# Altium PCB PCBSANPHAMBAOTRAN.PcbDoc
Units mil, origin at the board's own origin, x right, y up, seen from the top; angles counter-clockwise.
Board outline 8350 x 5430 mil, 2 copper layers (Top Layer, Bottom Layer); 65 components, 91 nets, 309 pads, 102 vias.
Unrouted connection lines stored in the file: 1.
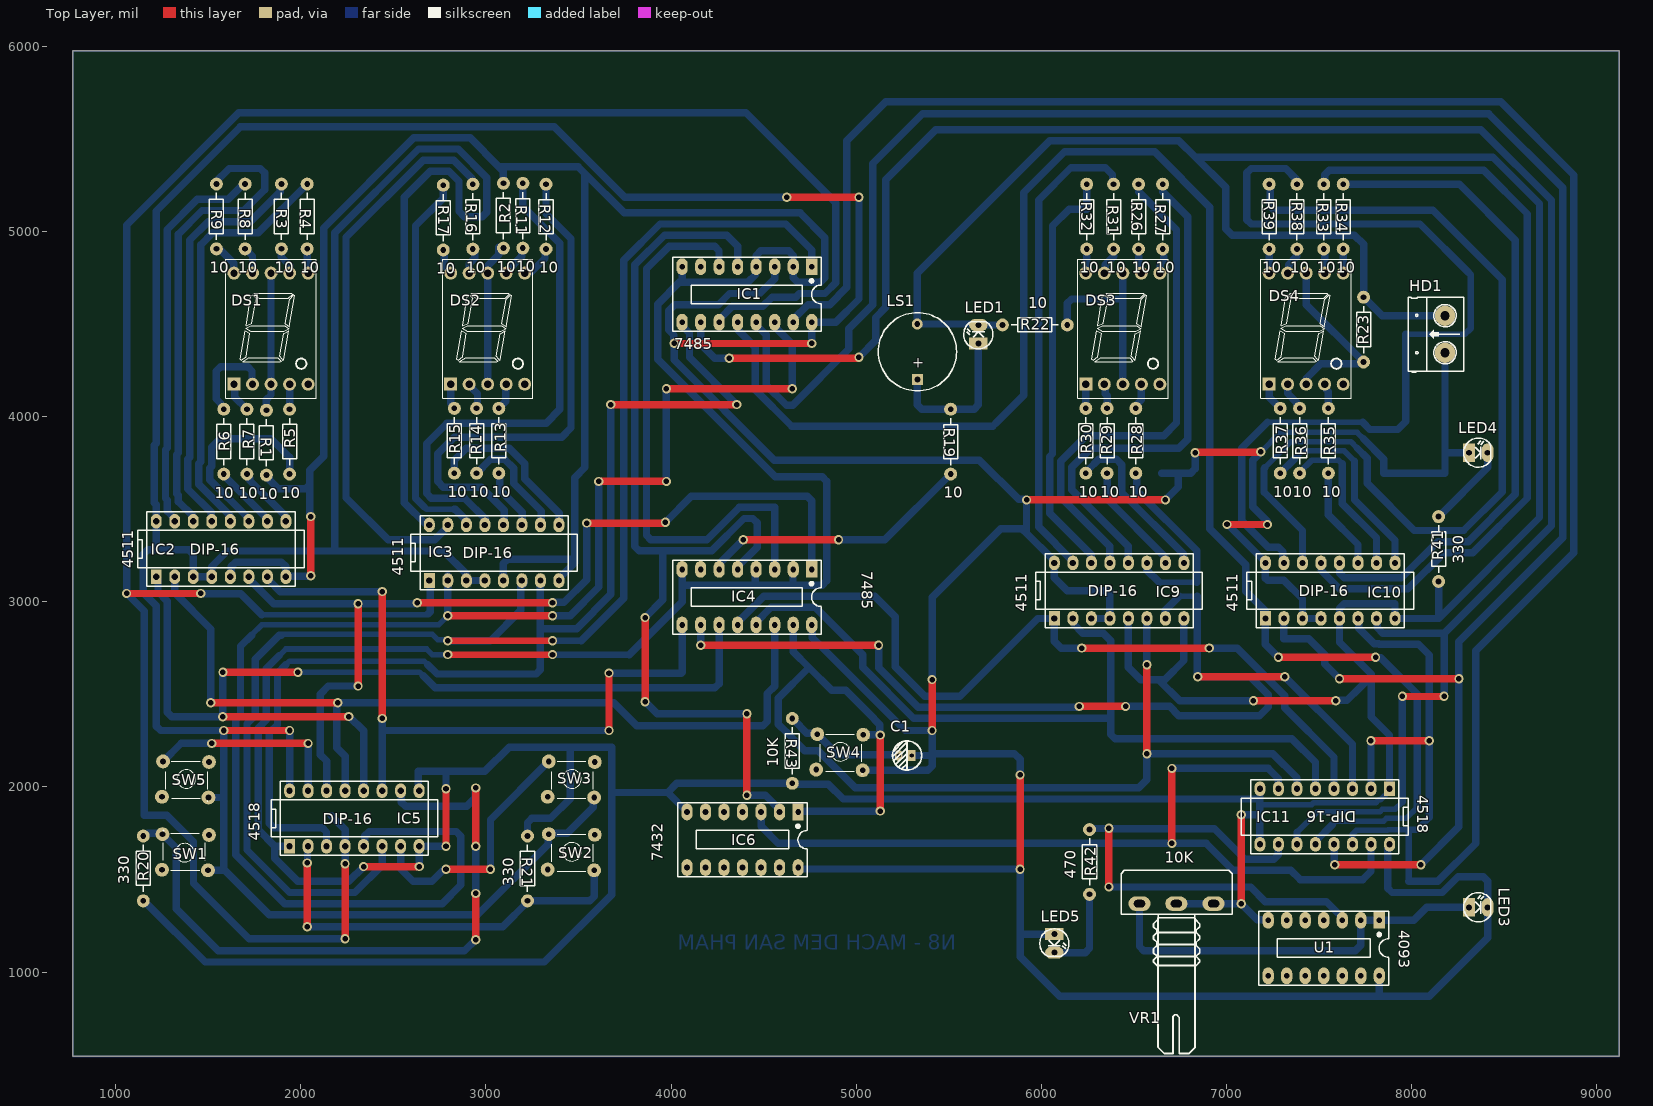
[diagram p0: Top Layer view]
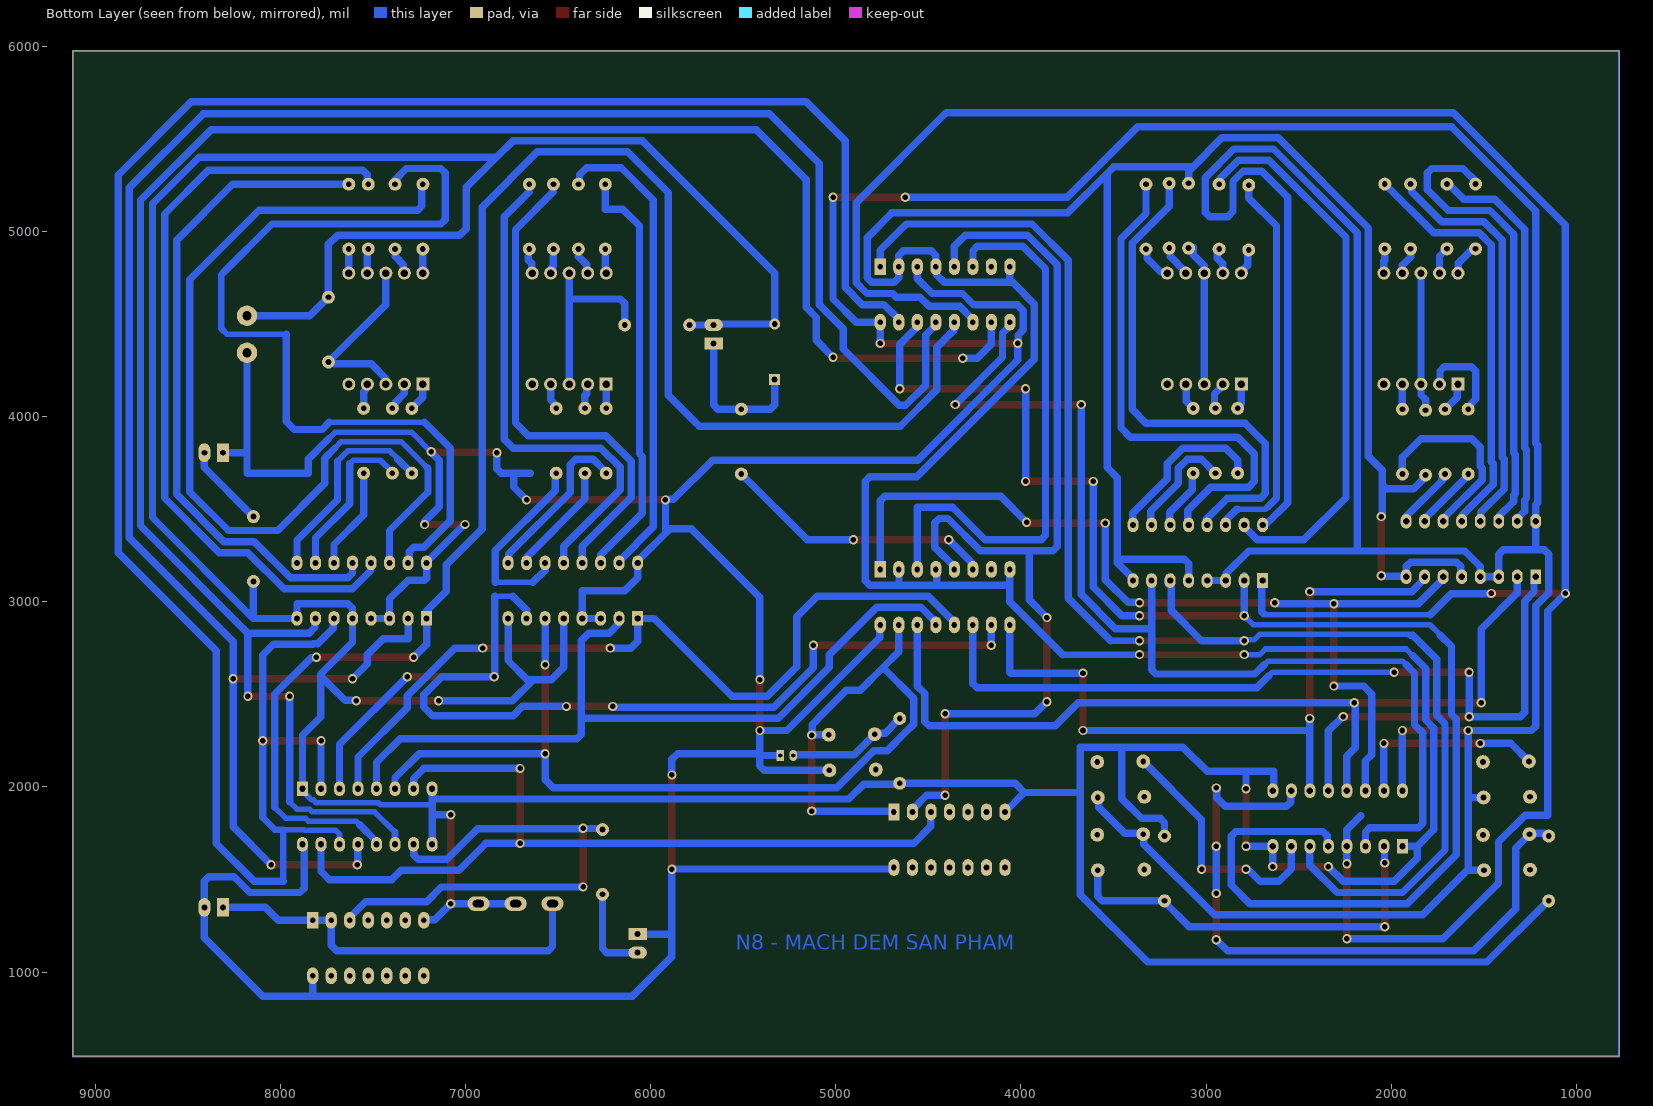
[diagram p1: Bottom Layer view, seen from below]
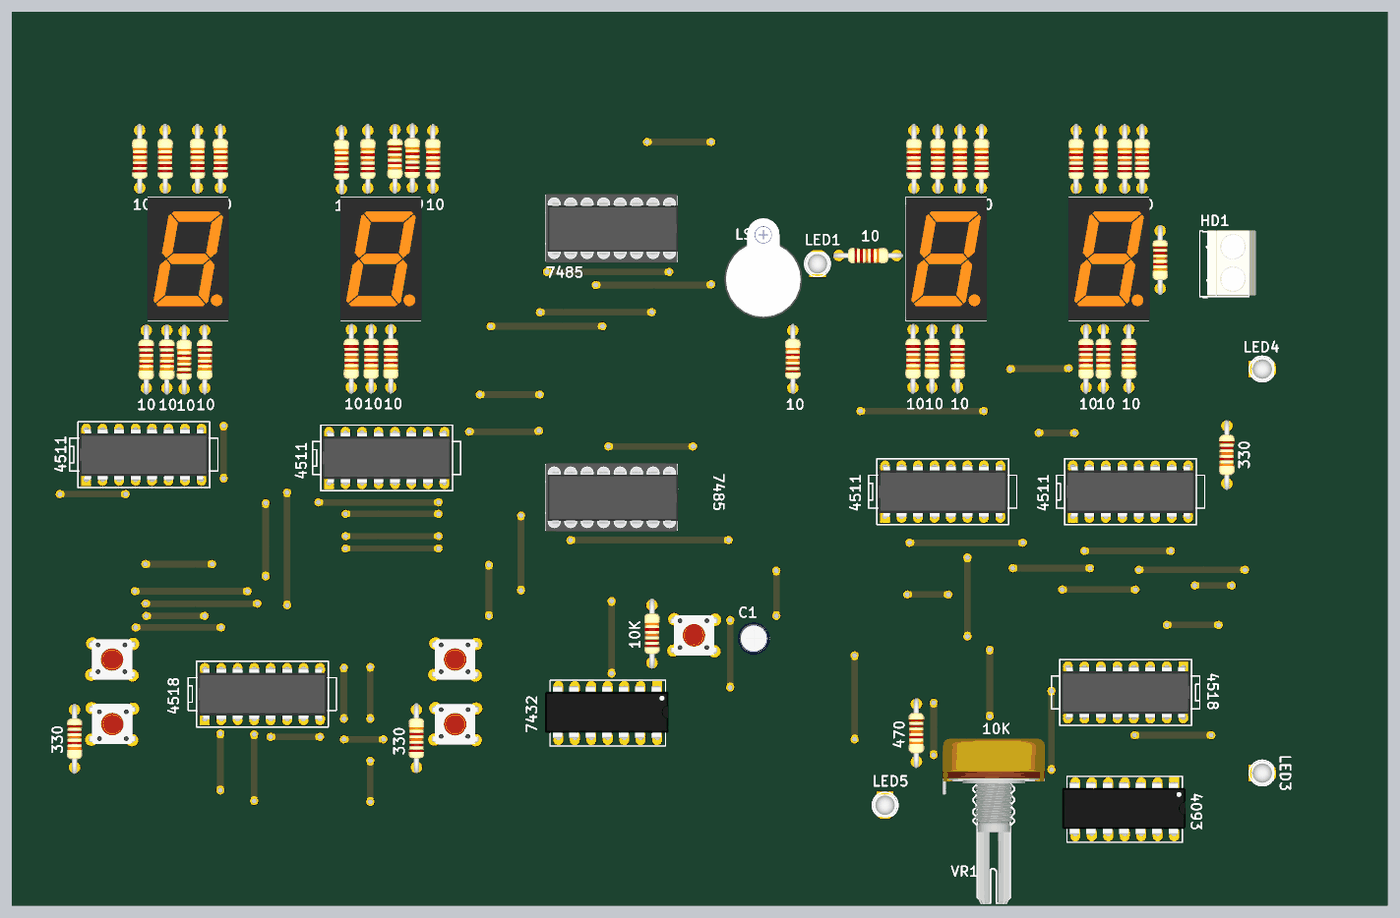
[diagram p2: 3D render of the assembled board from above, using the file's embedded part models]

## Layer stack, top to bottom
Top Solder: solder mask 0.4, Solder Resist, Dk 3.5
Top Layer: signal copper 1.4
Dielectric 1: dielectric 12.6, FR-4, Dk 4.8
Bottom Layer: signal copper 1.4
Bottom Solder: solder mask 0.4, Solder Resist, Dk 3.5

## Board outline
770,545 9120,545 9120,5975 770,5975

## Design rules (kind name [scope] priority, off if disabled: settings)
Clearance [All] p1: gap=20 ignorepadtopadclearanceinfootprint=FALSE
PolygonConnect [All] p1: connectstyle=Relief reliefconductorwidth=10 reliefentries=4 polygonreliefangle="90 Angle" airgapwidth=10
RoutingVias [All] p1: holewidth=30 width=50 viastyle="Through Hole" minholewidth=30 minwidth=50 maxholewidth=30 maxwidth=50
SolderMaskExpansion [All] p1: expansion=4 istentingtop=FALSE
Width [All] p1: maxlimit=40 minlimit=35 preferedwidth=40
30 further rules are at their usual default settings.

## Components (designator, comment, footprint, x,y, rotation, side; value= is the part's Value field where it differs from the comment)
C1 "10uF" "tu hoa 4mm" 5275,2170 r180 top
DS1 "7SEG" LED7SEG-1-0.56 1835,4450 r0 top
DS2 "7SEG" LED7SEG-1-0.56 3005,4450 r0 top
DS3 "7SEG" LED7SEG-1-0.56 6435,4450 r0 top
DS4 "7SEG" LED7SEG-1-0.56 7425,4450 r0 top
HD1 "Header 2" HED2 8180,4345 r90 top
IC1 "7485" DIP16/W0.3 4760,4810 r180 top
IC2 "4511" DIP16 1570.29,3285.08 r0 top value=74LS238
IC3 "4511" DIP16 3045,3265 r0 top value=74LS238
IC4 "7485" DIP16/W0.3 4760,3175 r180 top
IC5 "4518" DIP16 2290.29,1830.08 r0 top value=74LS238
IC6 "7432" DIP14/W0.3 4686.51,1865 r180 top
IC9 "4511" DIP16 6420.29,3060.08 r0 top value=74LS238
IC10 "4511" DIP16 7560.29,3060.08 r0 top value=74LS238
IC11 "4518" DIP16 7530,1840 r180 top value=74LS238
LED1 "LED" LED-3 5660,4395 r90 top value="LED 3 ly Single Colour"
LED3 "led thu" LED-3 8310,1350 r0 top value="LED 3 ly Single Colour"
LED4 "led phat" LED-3 8310,3805 r0 top value="LED 3 ly Single Colour"
LED5 "LED" LED-3 6070,1205 r270 top value="LED 3 ly Single Colour"
LS1 "Speaker" SPEAKER 5330.5,4200 r90 top
R1 "10" R1/4W 1815,4034.4 r270 top value="R1/4W - 1K"
R2 "10" R1/4W 3095,4910 r90 top value="R1/4W - 1K"
R3 "10" R1/4W 1896.01,5256.01 r270 top value="R1/4W - 1K"
R4 "10" R1/4W 2035,5256.01 r270 top value="R1/4W - 1K"
R5 "10" R1/4W 1940,3690 r90 top value="R1/4W - 1K"
R6 "10" R1/4W 1585,3690 r90 top value="R1/4W - 1K"
R7 "10" R1/4W 1710,3690 r90 top value="R1/4W - 1K"
R8 "10" R1/4W 1700,5256.01 r270 top value="R1/4W - 1K"
R9 "10" R1/4W 1545,5256.01 r270 top value="R1/4W - 1K"
R11 "10" R1/4W 3200,5260 r270 top value="R1/4W - 1K"
R12 "10" R1/4W 3325,5255 r270 top value="R1/4W - 1K"
R13 "10" R1/4W 3070,3694.51 r90 top value="R1/4W - 1K"
R14 "10" R1/4W 2950,3694.51 r90 top value="R1/4W - 1K"
R15 "10" R1/4W 2830,3694.51 r90 top value="R1/4W - 1K"
R16 "10" R1/4W 2930,5255 r270 top value="R1/4W - 1K"
R17 "10" R1/4W 2770,5250 r270 top value="R1/4W - 1K"
R19 "10" R1/4W 5510,4040 r270 top value="R1/4W - 1K"
R20 "330" R1/4W 1150,1385 r90 top value="R1/4W - 1K"
R21 "330" R1/4W 3225,1735 r270 top value="R1/4W - 1K"
R22 "10" R1/4W 6140,4495 r180 top value="R1/4W - 1K"
R23 "10" R1/4W 7740,4295 r90 top value="R1/4W - 1K"
R26 "10" R1/4W 6525,5255 r270 top value="R1/4W - 1K"
R27 "10" R1/4W 6655,5255 r270 top value="R1/4W - 1K"
R28 "10" R1/4W 6510,3694.51 r90 top value="R1/4W - 1K"
R29 "10" R1/4W 6355,3694.51 r90 top value="R1/4W - 1K"
R30 "10" R1/4W 6240,3694.51 r90 top value="R1/4W - 1K"
R31 "10" R1/4W 6390,5255 r270 top value="R1/4W - 1K"
R32 "10" R1/4W 6245,5255 r270 top value="R1/4W - 1K"
R33 "10" R1/4W 7525,5255 r270 top value="R1/4W - 1K"
R34 "10" R1/4W 7630,5255 r270 top value="R1/4W - 1K"
R35 "10" R1/4W 7550,3694.51 r90 top value="R1/4W - 1K"
R36 "10" R1/4W 7395,3694.51 r90 top value="R1/4W - 1K"
R37 "10" R1/4W 7290,3694.51 r90 top value="R1/4W - 1K"
R38 "10" R1/4W 7380,5255 r270 top value="R1/4W - 1K"
R39 "10" R1/4W 7230,5255 r270 top value="R1/4W - 1K"
R41 "330" R1/4W 8145,3110 r90 top value="R1/4W - 1K"
R42 "470" R1/4W 6260,1420 r90 top value="R1/4W - 1K"
R43 "10K" R1/4W 4655,2370 r270 top value="R1/4W - 1K"
SW1 "SW" SW4 1499,1550 r180 top value="Button chip 4 pin"
SW2 "SW" SW4 3340,1745 r0 top value="Button chip 4 pin"
SW3 "SW" SW4 3340,2138 r0 top value="Button chip 4 pin"
SW4 "SW" SW4 4790,2285 r0 top value="Button chip 4 pin"
SW5 "SW" SW4 1257,2138 r0 top value="Button chip 4 pin"
U1 "4093" DIP14 7825,1280 r180 top
VR1 "10K" VR-S1 6730,1370 r0 top value="Volume 50k"

## Footprints (in the part's own frame and the unit in brackets; to place one, negate y for a bottom-side part, rotate by r counter-clockwise, add the part's x,y. Pads: shape width x height; smd on the part's side, far side on the other; paste and mask are expansions set on the pad)
DIP14 [mil] "DIP, 14-Leads, Row Spacing 7.62mm, Pitch 2.54mm, Body 19.2x6.6mm"
  rect 60x90 hole 31: 1(0,0)
  oval 60x90 hole 31: 2(100,0) 3(200,0) 4(300,0) 5(400,0) 6(500,0) 7(600,0) 8(600,300) 9(500,300) 10(400,300) 11(300,300) 12(200,300) 13(100,300) 14(0,300)
  silkscreen extent -50,-50 650,350, body extent -70,-12 680,302, height 145
DIP14/W0.3 [mil] "14PIN, W 300mil, Pin to pin 100mil"
  rect 60x90 hole 31: 1(0,0)
  oval 60x90 hole 31: 2(100,0) 3(200,0) 4(300,0) 5(400,0) 6(500,0) 7(600,0) 8(600,300) 9(500,300) 10(400,300) 11(300,300) 12(200,300) 13(100,300) 14(0,300)
  silkscreen extent -50,-50 650,350, body extent -70,-12 680,302, height 145
DIP16 [mm]
  rect 1.5x2 hole 0.864: 1(-8.897,-3.812)
  oval 1.5x2 hole 0.864: 2(-6.357,-3.812) 3(-3.817,-3.812) 4(-1.277,-3.812) 5(1.263,-3.812) 6(3.803,-3.812) 7(6.343,-3.812) 8(8.883,-3.812) 9(8.883,3.808) 10(6.343,3.808) 11(3.803,3.808) 12(1.263,3.808) 13(-1.277,3.808) 14(-3.817,3.808) 15(-6.357,3.808) 16(-8.897,3.808)
  silkscreen extent -11.44,-5.08 11.42,5.08, body extent -10,-3.93 10,3.94, height 1.99
DIP16/W0.3 [mil] "16 PIN, W 300mil, Pin to pin 100mil"
  rect 60x90 hole 31: 1(0,0)
  oval 60x90 hole 31: 2(100,0) 3(200,0) 4(300,0) 5(400,0) 6(500,0) 7(600,0) 8(700,0) 9(700,300) 10(600,300) 11(500,300) 12(400,300) 13(300,300) 14(200,300) 15(100,300) 16(0,300)
  silkscreen extent -50,-50 750,350, body extent -52,-57 752,356, height 299
HED2 [mil] "Header 2, 2 pin, hight 300mil, Pin to Pin 200, Colour Green"
  round 110 hole 50: 1(0,0) 2(200,0)
  silkscreen extent -106,-100 300,200, body extent -92,-140 302,155, height 394
LED7SEG-1-0.56 [mil]
  rect 70x70 hole 40: 1(-195,-275)
  round 70 hole 40: 2(-95,-275) 3(5,-275) 4(105,-275) 5(205,-275) 6(205,325) 7(105,325) 8(5,325) 9(-95,325) 10(-195,325)
  silkscreen extent -239,-350 249,400, body extent -241,-349 251,399, height 315
LED-3 [mil] "LED 2 PIN, 3ly Only colour"
  rect 65x100 hole 32: 1(0,0)
  oval 65x100 hole 32: 2(100,0)
  silkscreen extent -29,-78 118,79, body extent -13,-75 125,75, height 217
R1/4W [mil] "R 1/4W, 2 Pin, 350mil"
  round 70 hole 31: 1(0,0) 2(350,0)
  silkscreen extent 48,-38 302,38, body extent -40,-47 386,47, height 111
SPEAKER [mm]
  rect 1.5x1.5 hole 0.8: 1(0,0)
  round 1.5 hole 0.8: 2(7.62,0.013)
  silkscreen extent -1.55,-5.38 9.18,5.36, body extent -2.22,-6 13.24,6, height 4.5
SW4 [mil] "SW button 4pin, 250 x250 mil"
  round 75 hole 31: 1(0,0) 2(245,-195) 3(248,-3) 4(-6,-191)
  silkscreen extent 15,-215 240,0, body extent -36,-220 276,24, height 276
"tu hoa 4mm" [mm]
  rect 1x1.5 hole 0.6: 1(-0.635,0)
  oval 1x1.5 hole 0.6: 2(1.143,0)
  silkscreen extent -2,-2 2.01,2.01, body extent -2.47,-2.47 2.58,2.58, height 14.81
VR-S1 [mil]
  oval 120x78.74 hole 40 slot 60 at 0 deg: 1(-200,0) 2(-1,0) 3(200,0)
  silkscreen extent -299,-810 300,179, body extent -310,-818 310,188, height 839

## Part data
C1: library part "Tu Hoa 10uF 25V 4x7", "Cắm", Chung_Loai=Cắm, Don_Vi=Con, Ma_Hang=MH001349, So_Chan=2, Ten_Linh_Kien="Tụ Hóa 10uF 25V 4x7MM"
DS1 DS2 DS3 DS4: library part LED7SEG-1, "14.2 mm General Purpose Blue 7-Segment Display: CC, RH DP, Gray Surface", Colour=Blue, PackageDocument=24-Sep-2002, ComponentLink1Description="Manufacturer Link", ComponentLink1URL=http://www.agilent.com/, DatasheetDocument=24-Sep-2002, LatestRevisionDate=17-Dec-2003, LatestRevisionNote="Schematic revised, PCB Footprint replaced.", MinimumIntensity="2020 ucd", Note="IF = 10 mA", PackageReference=H, Published=8-Jun-2000, Publisher="Altium Limited"
HD1: library part Hed2, "Header 2 (Green)"
IC1 IC4: "4-Bit Magnitude Comparator", Copyright by=VanDungEvn@Gmail.com
IC2 IC3 IC5 IC9 IC10 IC11: library part 74247, Copyright by=VanDungEvn@Gmail.com
IC6: "Quad 2-Input OR Gate"
LED1 LED5: "LED Single colour Green and Red"
LED3 LED4: library part LED, "LED Single colour Green and Red"
LS1: "Loudspeaker", LatestRevisionDate=17-Jul-2002, LatestRevisionNote="Re-released for DXP Platform.", PackageReference=PIN2, Published=24-Mar-1999, Publisher="Altium Limited"
R1 R2 R3 R4 R5 R6 R7 R8 R9 R11 R12 R13 R14 R15 R16 R17 R19 R20 R21 R22 R23 R26 R27 R28 R29 R30 R31 R32 R33 R34 R35 R36 R37 R38 R39 R41 R42 R43: library part R1/4W, "Resistor 1/4W"
SW1 SW2 SW3 SW4 SW5: library part SW4, "Switch button 4 pin"
U1: "Quad 2-INPUT NAND SCHMITT TRIGGER"
VR1: library part VR-S, "Var Resistor"

## Via types
v1: diameter 50, hole 30, Top Layer to Bottom Layer, 102 vias

## Nets (pads, with @x,y where several pads share a name; then routed paths per layer and width w, separated by ;. In a path a pad name is that pad's centre, name@x,y a point inside that pad or via, vN(x,y) a via of type N, cw(c..) or ccw(c..) an arc to the next point about the centre after c; other vN are vias at no path point)
1: C1.2 IC4.15 IC6.1 IC9.6 IC11.6 R43.1 SW4.1 | length 6747.9
  Top Layer w40: v1(5130,1870) v1@5130,2277.29 ; v1(6570,2180) v1(6570,2660)
  Bottom Layer w40: IC4.15 4660,2730 4745,2645 ; R43.1@4664.52,2360.48 4734,2291 SW4.1@4790,2291 ; IC6.1 4693.42,1865 4696.51,1868.09 5128.09,1868.09 v1(5130,1870) ; SW4.1 4900,2175 C1.2@5230,2175 ; 5038,2282 5039,2281 5129,2281 v1(5130,2280) 5128.09,2281.91 5128.09,2336.91 5067.88,2397.12 4942.9,2522.1 4867.9,2522.1 4745,2645 ; C1.2 C1.2@5230,2179.21 ; v1(6570,2660) IC9.6 ; IC11.6 7380.29,2050 7250.29,2180 v1(6570,2180) 6570,2040 6525,1995 4995.15,1995 4794.15,2196 4722.93,2196 4623.93,2295 4580,2338.93 4580,2480 4745,2645
2: IC4.13 IC9.2 IC11.5 | length 4338.3
  Bottom Layer w40: IC4.13 4460,2890 4540,2970 4778.99,2970 5034.57,2714.42 5034.57,2645.58 5310.15,2370 6375,2370 ; IC9.2 6173.65,2906.35 6173.65,2881.35 6224.37,2830.63 6334.37,2830.63 6375,2790 6375,2370 ; IC11.5 7480.29,2132.81 7353.11,2260 6398.43,2260 6375,2283.43 6375,2370
3: IC4.12 IC9.1 IC11.4 | length 4443.2
  Top Layer w40: v1(6218.43,2750) v1(6907,2750)
  Bottom Layer w40: IC4.12 4360,2890 4500,3030 5100,3030 5210,2920 5210,2650 5370,2490 5560.47,2490 5980.47,2910 IC9.1 6070,2786.17 6107.73,2748.43 6216.86,2748.43 v1(6218.43,2750) ; v1(6907,2750) 7057.99,2750 7314.56,2493.43 7314.56,2427.3 7580.29,2161.57 IC11.4
4: IC4.10 IC9.7 IC11.3 | length 5822.4
  Top Layer w40: v1(4160,2765) 4160.48,2765.48 5120.48,2765.48 v1(5120.96,2765.96) ; v1@6207.71,2435 v1(6455,2435) ; v1(6845,2595) v1(7315,2595)
  Bottom Layer w30: 6745,3030 6842,3030
  Bottom Layer w40: v1(4160,2765) IC4.10 ; v1(5120.96,2765.96) 5120.96,2644.04 5335,2430 6197.29,2430 6202.29,2435 v1(6205,2435) ; v1(6455,2435) 6692.88,2435 6742.88,2385 7178.14,2385 7225,2431.86 7225,2498.14 7128.14,2595 v1(6845,2595) 6842,2598 6842,3030 ; IC9.7 6670,2955 6745,3030 ; v1(7315,2595) 7680.29,2229.71 IC11.3
5: IC1.15 IC10.6 IC11.2 IC11.14 | length 12353.9
  Top Layer w40: v1(7780,2250) v1(8095,2250)
  Bottom Layer w30: IC11.14 7680.31,1745.31 7700.71,1765.71 7869.15,1765.71 7873.45,1770 7985,1770
  Bottom Layer w35: 7985,1490 7985,1770 8030,1770 8095,1835
  Bottom Layer w40: IC1.15 4660,4525 4740,4605 4856.27,4605 4950,4698.73 4950,5490 5160,5700 8480,5700 8875,5305 8875,3265 8345,2735 8345,1695 8140,1490 7985,1490 ; IC10.6 7713.23,2906.77 7713.23,2856.77 7797.29,2772.71 7823.53,2772.71 7825.62,2770.63 8036.74,2770.63 8095,2712.37 v1(8095,2250) 8095,1835 ; v1(7780,2250) 7780,1990.37 IC11.2
6: IC1.13 IC10.2 IC11.13 | length 11758.2
  Top Layer w40: v1(7585,1580) v1(8050,1580) ; v1(7610,2585) v1(8255,2585)
  Bottom Layer w40: IC1.13 4467.04,4502.96 4467.04,4488.97 4515,4441 4515,4170 4623.43,4061.57 4656.57,4061.57 4960,4365 4960,4475 5090,4605 5090,5367 5358,5635 8415,5635 8815,5235 8815,3345 8255,2785 8255,1785 v1(8050,1580) ; IC10.2 7310,2800 7445,2800 7531.17,2713.83 7531.17,2663.83 v1(7610,2585) ; IC11.13 7582.65,1687.72 7582.65,1582.35 v1(7585,1580)
7: IC1.12 IC10.1 IC11.12 | length 8989
  Top Layer w40: v1(7280,2700) v1(7805,2700)
  Bottom Layer w30: 7570,1795 7590.71,1815.71 7848.44,1815.71 7862.74,1830 7970,1830 8030,1890
  Bottom Layer w40: IC1.12 4363.83,4506.17 4363.83,4466.17 4455,4375 4455,4145 4650.93,3949.07 5738.92,3949.07 5759.85,3970 5905,4115.15 5905,5210 6125,5430 6611.42,5430 6910,5131.42 6910,3395 7104,3201 7104,3057 7210,2951 7210,2770 v1(7280,2700) ; IC11.12 7480.29,1705.29 7570,1795 ; v1(7805,2700) 7806.91,2698.09 7833.84,2698.09 8030,2501.92 8030,1890
8: IC1.10 IC10.7 IC11.11 | length 10730.5
  Top Layer w40: v1(4313.95,4315.53) 5007.82,4315.53 5012.29,4320 v1(5015,4320) ; v1(7950,2490) 7951.25,2488.75 8173.75,2488.75 v1(8175,2490)
  Bottom Layer w30: 7380.29,1755.29 7490.71,1865.71 7827.73,1865.71 7842.03,1880 7910,1880 7949.82,1919.82
  Bottom Layer w40: IC1.10 4160,4390.91 4235.24,4315.67 4313.8,4315.67 v1(4313.95,4315.53) ; v1(5015,4320) 5015,4321.52 5105,4411.52 ; 5105,4415.52 5105,4535.15 5160,4590.15 5160,5280 5430,5550 8373.85,5550 8755,5168.85 8755,3410.63 8175,2830.63 ; IC11.11 7380.29,1755.29 ; IC10.7 7813.65,2906.35 7813.65,2861.35 7844.37,2830.63 8175,2830.63 ; 7949.82,1919.82 7949.82,2489.82 v1(7950,2490) ; v1(8175,2490) 8175,2830.63
+5: C1.1 HD1.1 IC1.3 IC1.16 IC2.3 IC2.4 IC2.16 IC3.3 IC3.4 IC3.16 IC4.16 IC5.16 IC9.3 IC9.4 IC9.16 IC10.3 IC10.4 IC10.16 IC11.16 LED3.2 LED4.1 LED5.1 SW1.1 SW2.1 SW3.2 SW4.2 SW5.2 U1.14 | length 39931
  Top Layer w40: v1(1585,2305) v1(1940,2305) ; v1(4017.46,4395.53) 4017.99,4395 v1(4760,4395) ; v1(4625,5185) v1(5015,5185) ; v1(5410,2305) v1(5410,2580) ; v1(5885,1555) v1(5885,2065) ; v1(5920,3550) v1(6670,3550) ; v1(6830,3805) 6832.5,3807.5 7182.5,3807.5 v1(7185,3810) ; v1(7002.57,3417.57) 7002.94,3417.2 7220.38,3417.2 v1(7220.75,3416.82)
  Bottom Layer w30: v1(7185,3810) 7289.51,3914.51 7705.49,3914.51 7739.7,3880.3
  Bottom Layer w40: 1261,3280 1220,3280 ; 1265,3280 1396.57,3280 1420,3256.57 IC2.3 IC2.4 1520.8,3135.8 1520.8,3190.65 1604.52,3274.37 2185,3274.37 ; SW5.2 1585,1943 ; SW1.1@1508.14,1550 1590,1550 1830,1310 2955,1310 3336.06,1691.06 3336.06,1741.06 SW2.1 3345.44,1750.44 3440.44,1750.44 3580.06,1890.06 3580.06,1938.06 SW3.2 ; 1585,1550 1585,1943 ; IC5.16 v1(1940,2305) ; IC3.16 2680.08,3414.92 2560,3535 2560,5185 2700,5325 2801.07,5325 2855,5271.07 2855,5108.43 2883.43,5080 2981.57,5080 3005,5103.43 3005,5290.77 2850.77,5445 2636.15,5445 2185,4993.85 2185,3274.37 ; IC3.4@3000.93,3130.99 3000.93,3121.15 IC3.4 IC3.3 2891.06,3118.57 2891.06,3153.49 2770.18,3274.37 2185,3274.37 ; IC1.3 4560,4745 4480,4665 4316.15,4665 4256.15,4605 4020,4605 3987.5,4572.5 3987.5,4468.51 4015.55,4440.46 4015.55,4397.44 v1(4017.46,4395.53) 4017.46,4305.53 4557.99,3765 5665,3765 5877,3553 5914.29,3553 5917.29,3550 v1(5920,3550) 5920,3369.84 ; v1(4625,5185) 3750,5185 3370,5565 1674.85,5565 1220,5110.15 1220,3855.33 1210,3845.33 1210,3534.67 1220,3524.67 IC2.16 1220,3280 ; 4686.51,1565 4694.59,1556.91 5883.09,1556.91 v1(5885,1555) 5885,1205 ; IC4.16 4760,2854.59 4763.83,2850.76 4763.83,2806.77 5265.59,2305 v1(5410,2305) 5410,2180 ; v1(4760,4395) IC1.16@4760,4500.76 ; IC1.16 4890,4510 5015,4635 v1(5015,5185) ; SW4.2 5386.57,2090 5410,2113.43 5410,2155 5410,2180 ; C1.1 5400,2170 ; v1(5410,2580) 5410,3025 5779.92,3394.92 5894.92,3394.92 5920,3369.84 ; v1(5885,2065) 5885,2150 5855,2180 5410,2180 ; LED5.1 5885,1205 ; IC9.3 IC9.4 6370,3060 6140,3060 6070,3130 IC9.16 6063.78,3216.22 6063.78,3226.07 5920,3369.84 ; 6648.86,3695 6740,3695 ; v1(6670,3550) 6740,3620 6740,3695 ; v1(6830,3805) 6830,3718.43 6806.57,3695 6740,3695 ; v1(7002.57,3417.57) 7007.42,3417.57 7210,3214.99 IC10.16 7210,3128 7222,3116 7310,3116 7410,3016 IC10.3 IC10.4 ; v1(7185,3810) 7185,3807.29 7142.35,3764.65 7142.35,3512.65 7220,3435 7220,3420 7220.75,3419.25 v1(7220.75,3416.82) ; 7739.7,3880.3 7850,3770 7850,3694.51 8180,3694.51 8180,3805 ; U1.14 7825,870 ; IC11.16 7880.29,1675.08 7870,1664.78 7870,1453.43 7893.43,1430 8164.85,1430 8249.85,1515 8386.57,1515 8410,1491.57 LED3.2 8410,1185 8095,870 7825,870 ; HD1.1@8180,4347.16 8180,3805 ; LED4.1 8180,3805 ; 1220,3280 1173.9,3280 1150.47,3256.57 1150.47,3047.66 1220,2978.14 1220,2328.43 1243.43,2305 v1(1585,2305) 1585,1943 ; 5885,1205 5885,1084 6099,870 7825,870
GND: HD1.2 IC1.2 IC1.4 IC1.8 IC2.5 IC2.8 IC3.5 IC3.8 IC4.2 IC4.4 IC4.8 IC5.1 IC5.8 IC5.9 IC6.7 IC9.5 IC9.8 IC10.5 IC10.8 IC11.1 IC11.8 IC11.9 LED1.2 LS1.2 R1.2 R2.2 R20.1 R21.1 R22.2 R23.2 R41.1 R43.2 U1.7 VR1.2 VR1.3 | length 42803.2
  Top Layer w35: v1(2795,2715) v1(3360,2715)
  Top Layer w40: v1(2055,3140) v1(2055,3460) ; v1(2340,1570) v1(2640,1570) ; v1(2785,1679.37) v1(2785,1990) ; v1(7080,1370) v1(7080,1850) ; v1(7145,2465) v1(7590,2465)
  Bottom Layer w30: 1885.15,2710 1920.15,2745 2679.87,2745 2710,2714.87 2794.87,2714.87 v1(2795,2715) ; 7190,1905 7459.29,1905 7470,1915.71 7807.02,1915.71 7821.32,1930 7830.06,1930 7881.72,1981.66 IC11.1@7881.72,1988.65
  Bottom Layer w35: v1(3360,2715) 3775,2715
  Bottom Layer w40: R20.1@1169.83,1370.17 1485,1055 3316.42,1055 3680,1418.58 3680,1970 ; IC2.5 1623.65,3138.65 1623.65,3161.96 1625,3163.32 1625,3190.94 1648.43,3214.37 1896.05,3214.37 1919.49,3190.94 1919.49,3135.51 IC2.8 ; R1.2@1815,3681.28 1830,3666.28 1830,3660 1880,3610 2026.57,3610 2050,3633.43 ; R1.2@1816.09,3680.85 R1.2@1816.09,3688.97 ; 1885.15,2710 1815,2639.85 1815,2361.78 1770,2316.78 1770,1770 1860,1680 ; IC2.8@1922.5,3137.5 2052.5,3137.5 v1(2055,3140) ; IC5.1 1860,1680 ; v1(2055,3460) 2050,3465 2050,3633.43 ; v1(2340,1570) 2260,1490 1985,1490 1860,1615 1860,1680 ; v1(2640,1570) IC5.8 ; IC5.8@2640.31,1679.69 2784.68,1679.69 v1(2785,1679.37) ; IC5.9@2640.64,1979.36 2636.35,1983.65 2636.35,2006.96 2635,2008.32 2635,2085 2785,2085 ; v1(2785,1990) 2785,2085 ; R2.2 3095,5325 3070,5350 ; IC3.5@3100,3105 3094.71,3110.29 IC3.5 3094.71,3206.57 3118.14,3230 3460,3230 3480,3210 ; R21.1 3225,1806.57 3248.43,1830 3348.57,1830 3455,1936.43 3455,2211.5 ; IC3.8 3394.71,3124.71 3400,3130 3480,3210 ; 3775,2715 4060,3000 4060,3090 ; IC4.8 4060,3090 ; IC1.8 4060,4740 4045,4725 ; IC6.7 3981.51,1970 ; IC4.4@4455,3161.12 4455,3090 ; R43.2@4655,2015 4850,2015 4930,1935 7180.29,1935 ; R43.2 4498.94,2020 4031.51,2020 3981.51,1970 ; 4658.86,3113.86 4658.86,3173.86 IC4.2 ; R22.2@5790,4481.14 5776.14,4495 LED1.2 5635.74,4495 5630.74,4500 LS1.2 5330,4775 6045,5490 6742.68,5490 6832.68,5400 ; IC9.5 6470,2646.86 6536.86,2580 6632.74,2580 ; VR1.2 VR1.3 v1(7080,1370) 7166.36,1283.64 7221.36,1283.64 U1.7 ; IC9.8 6770,2683.22 6666.78,2580 6632.74,2580 ; v1(7080,1850) 7180.29,1850 ; v1(7145,2465) 6747.74,2465 6632.74,2580 ; IC11.9 7180.29,1850 ; IC11.8 7180.29,1935 ; v1(7590,2465) 7592.71,2465 7595,2467.3 7650.43,2467.3 7718.65,2535.51 7781.86,2598.73 ; IC11.1@7880,2005.79 7880,2279.72 7781.86,2377.86 7781.86,2598.73 ; R41.1 8143.43,3110 8145,3108.43 8145,2910 ; HD1.2 7840,4545 R23.2 7740,4930 7690,4980 7030,4980 6995,5015 6995,5237.68 6832.68,5400 ; 2050,3633.43 2050,3710 2125,3785 2125,5018.71 2611.3,5505 2915,5505 3070,5350 ; 2785,2085 2995,2085 3125.5,2215.5 3680,2215.5 3680,1970 ; 3070,5350 3498,5350 3535,5313 ; 3480,3210 3480,3230 3480,3670 3535,3725 3535,5313 ; 3535,5313 3748,5100 4696.86,5100 4830,4966.86 4830,4748.43 4806.57,4725 4685,4725 4660,4750 IC1.2 4660,4870 4635,4895 4485,4895 4460,4870 IC1.4 4456.17,4806.17 4456.17,4766.17 4415,4725 4060,4725 4045,4725 ; 3680,1970 3981.51,1970 ; 4045,4725 3927.5,4607.5 3927.5,4310.64 4563.14,3675 4816.57,3675 4840,3651.57 4840,3113.43 4816.57,3090 4455,3090 ; 4060,3090 4455,3090 ; 6832.68,5400 8439,5400 8690,5149 8690,3455 8145,2910 ; 7180.29,1850 7180.29,1935 ; 7781.86,2598.73 7781.86,2610 7610,2781.86 IC10.5 7610,2965 7635,2990 7910,2990 IC10.8 8145,2910
NetDS1_1: DS1.1 R7.2 | length 164
  Bottom Layer w40: DS1.1 1644.93,4170.07 1644.93,4105.07 R7.2
NetDS1_2: DS1.2 R6.2 | length 515.8
  Bottom Layer w40: R6.2@1598.12,4040 1593.12,4040 1570,4063.12 1570,4070 1545,4095 1545,4246.57 1568.43,4270 1713.79,4270 1737.22,4246.57 1737.22,4177.78 DS1.2
NetDS1_3: DS1.3 DS1.8 R1.1 | length 751
  Bottom Layer w40: R1.1 1815,4092 1840,4117 DS1.3 DS1.8
NetDS1_4: DS1.4 R5.2 | length 140
  Bottom Layer w40: R5.2@1940,4035 DS1.4
NetDS1_6: DS1.6 R4.2 | length 133.1
  Bottom Layer w40: R4.2 2035,4843 2040,4838 DS1.6
NetDS1_7: DS1.7 R3.2 | length 149.2
  Bottom Layer w40: R3.2 1896.01,4861.99 1940,4818 DS1.7
NetDS1_9: DS1.9 R8.2 | length 148.5
  Bottom Layer w40: R8.2@1705.74,4909.26 1705.74,4901.83 1740,4867.57 DS1.9
NetDS1_10: DS1.10 R9.2 | length 183.6
  Bottom Layer w40: R9.2@1545,4915 1545,4914.12 1558.86,4900.27 1566.16,4900.27 1638.54,4827.89 1638.54,4776.46 DS1.10
NetDS2_1: DS2.1 R15.2 | length 138.8
  Bottom Layer w40: DS2.1 2810,4072.63 2830,4052.63 R15.2
NetDS2_2: DS2.2 R14.2 | length 151.1
  Bottom Layer w40: DS2.2 2910,4168.93 2955,4123.93 R14.2@2955,4042.57
NetDS2_3: DS2.3 DS2.8 R2.1 | length 764.9
  Bottom Layer w40: DS2.3 DS2.8 3010,4815 3070,4875 R2.1@3070,4915
NetDS2_4: DS2.4 R13.2 | length 152.9
  Bottom Layer w40: R13.2@3065.87,4040.38 3065.87,4040.98 3107.83,4082.94 3107.83,4172.83 DS2.4
NetDS2_6: DS2.6 R12.2 | length 194.5
  Bottom Layer w40: DS2.6 3215.74,4780.74 3244.53,4780.74 3319.72,4855.93 3319.72,4899.72 R12.2
NetDS2_7: DS2.7 R11.2 | length 169.2
  Bottom Layer w40: DS2.7@3112.18,4777.18 3112.18,4783.24 3194.26,4865.33 3194.26,4904.26 R11.2
NetDS2_9: DS2.9 R16.2 | length 142.4
  Bottom Layer w40: DS2.9 2910,4825 2940,4855 R16.2@2940,4905
NetDS2_10: DS2.10 R17.2 | length 148.3
  Bottom Layer w40: R17.2@2783.86,4905.74 2775.74,4897.62 2775.74,4817.38 2810,4783.12 DS2.10
NetDS3_1: DS3.1 R30.2 | length 70
  Bottom Layer w40: R30.2@6240,4075 DS3.1@6240,4145
NetDS3_2: DS3.2 R29.2 | length 136.7
  Bottom Layer w40: DS3.2 6345.74,4169.26 6345.74,4123.07 6355,4113.81 R29.2
NetDS3_3: DS3.3 DS3.8 R22.1 | length 1012.7
  Bottom Layer w40: R22.1@6140,4478.58 6140,4611.57 6163.43,4635 6440,4635 ; DS3.3 6440,4635 ; DS3.8@6440,4745 6440,4635
NetDS3_4: DS3.4 R28.2 | length 97.4
  Bottom Layer w40: R28.2@6510,4060 6540,4090 DS3.4@6540,4145
NetDS3_6: DS3.6 R27.2 | length 97.9
  Bottom Layer w40: DS3.6 6642.18,4777.18 6642.18,4827.18 6660,4845 6660,4864.58
NetDS3_7: DS3.7 R26.2 | length 74.2
  Bottom Layer w40: 6525,4865 6525,4812 DS3.7@6540,4797
NetDS3_9: DS3.9 R31.2 | length 110.7
  Bottom Layer w40: DS3.9 6345.74,4780.74 6345.74,4820.74 6390,4865
NetDS3_10: DS3.10 R32.2 | length 92.1
  Bottom Layer w40: DS3.10 6240,4802 6245,4807 6245,4865
NetDS4_1: DS4.1 R37.2 | length 139.9
  Bottom Layer w40: DS4.1@7230,4145 7230,4105 7290,4045 R37.2@7290,4060
NetDS4_2: DS4.2 R36.2 | length 127.4
  Bottom Layer w40: DS4.2@7330,4145 7330,4125 7380,4075 7380,4067.63 7395,4052.63 R36.2
NetDS4_3: DS4.3 DS4.8 R23.1 | length 956.3
  Bottom Layer w40: DS4.3 7430,4206 7509,4285 7708.79,4285 7713.05,4289.26 7734.26,4289.26 R23.1 7430,4605 DS4.8@7430,4745
NetDS4_4: DS4.4 R35.2 | length 107.8
  Bottom Layer w40: DS4.4@7537.78,4147.22 7550,4135 R35.2
NetDS4_6: DS4.6 R34.2 | length 143.9
  Bottom Layer w40: DS4.6 R34.2@7630,4918.86
NetDS4_7: DS4.7 R33.2 | length 132.1
  Bottom Layer w40: R33.2 7530,4900 DS4.7
NetDS4_9: DS4.9 R38.2 | length 110.7
  Bottom Layer w40: DS4.9 7335.74,4780.74 7335.74,4820.74 7380,4865
NetDS4_10: DS4.10 R39.2 | length 140
  Bottom Layer w40: DS4.10 R39.2@7230,4915
NetIC1_5: IC1.5 IC4.5 IC6.2 | length 5406.9
  Top Layer w40: v1(3860,2460) v1(3860,2915) ; v1(4410,1955) v1(4410,2395)
  Bottom Layer w40: v1(3860,2460) 3925,2395 v1(4410,2395) ; v1(3860,2915) 3955,3010 3955,3260 ; IC4.5 4360,3180 4355,3185 4465,3295 4465,3426.57 4441.57,3450 4394.41,3450 4219.41,3275 3828.58,3275 3805,3298.58 3805,4819.85 3965.15,4980 4300,4980 4360,4920 IC1.5 ; v1(4410,1955) 4510.5,1955 4579.47,1886.03 4579.47,1872.04 IC6.2
NetIC1_6: IC1.6 IC4.3 | length 3087.9
  Bottom Layer w40: IC1.6 4259.29,4810.71 4259.29,4896.57 4235.86,4920 3990,4920 3867.5,4797.5 3867.5,3358.43 3890.93,3335 4194.56,3335 4369.56,3510 4560,3510 IC4.3
NetIC2_9: IC2.9 R7.1 | length 328.1
  Bottom Layer w40: R7.1@1714.08,3677.8 1725,3666.88 1725,3655 1916.35,3463.65 1916.35,3438.65 IC2.9
NetIC2_10: IC2.10 R6.1 | length 338.5
  Bottom Layer w40: R6.1@1590.74,3678.52 1820,3449.26 IC2.10
NetIC2_11: IC2.11 R5.1 | length 1033.1
  Bottom Layer w40: IC2.11@1710,3458.93 1510,3658.93 1510,3721.07 1520,3731.07 1520,3835 1565,3880 1840,3880 1940,3780 R5.1
NetIC2_12: IC2.12 R4.1 | length 2277.9
  Bottom Layer w40: IC2.12 1616.35,3438.65 1616.35,3467.73 1450,3634.08 1450,3745.92 1460,3755.92 1460,4927.07 1525.93,4993 1771.99,4993 R4.1
NetIC2_13: IC2.13 R3.1 | length 2222.2
  Bottom Layer w40: IC2.13@1516.35,3428.7 1516.35,3482.87 1390,3609.23 1390,3770.77 1400,3780.77 1400,4951.92 1501.08,5053 1728,5053 1890.27,5215.27 1890.27,5250.27 R3.1
NetIC2_14: IC2.14 R9.1 | length 2534.8
  Bottom Layer w40: IC2.14@1419.52,3450.48 1416.35,3453.64 1416.35,3463.65 1340,3540 1340,3574.38 1330,3584.38 1330,3795.62 1340,3805.62 1340,4985.77 1467.23,5113 1693,5113 1805,5225 1805,5316.57 1781.57,5340 1613.65,5340 R9.1@1541.82,5268.18
NetIC2_15: IC2.15 R8.1 | length 2112.4
  Bottom Layer w40: IC2.15@1323.65,3440.16 1323.65,3446.35 1280,3490 1280,3549.52 1270,3559.52 1270,3820.48 1280,3830.48 1280,5010.62 1442.38,5173 1608,5173 R8.1@1693.1,5258.1
NetIC3_9: IC3.9 R15.1 | length 901
  Bottom Layer w40: R15.1 2830,3765 2894.51,3829.51 3125.92,3829.51 3210,3745.43 3210,3663.44 3396.06,3477.38 3396.06,3438.65 IC3.9@3399.71,3435
NetIC3_10: IC3.10 R14.1 | length 598.9
  Bottom Layer w40: R14.1 3025,3769.51 3101.07,3769.51 3150,3720.57 3150,3638.59 3298.42,3490.17 3298.42,3436.29 IC3.10@3299.71,3435
NetIC3_11: IC3.11 R13.1 | length 329.6
  Bottom Layer w40: R13.1@3075,3690 3075.74,3689.26 3075.74,3604.11 3196.06,3483.79 3196.06,3421.51 3193.48,3418.93 3196.06,3416.36 IC3.11@3199.71,3416.36
NetIC3_12: IC3.12 R12.1 | length 2782.7
  Bottom Layer w40: IC3.12@3099.71,3435 3099.71,3495.29 2975.49,3619.51 2770.49,3619.51 2740,3650 2740,3800 2829.51,3889.51 3409.08,3889.51 3460,3940.43 3460,4960.92 3325,5095.92 R12.1
NetIC3_13: IC3.13 R11.1 | length 2757.9
  Bottom Layer w40: IC3.13@2999.71,3435 2999.71,3444.84 2885.04,3559.51 2705.2,3559.51 2680,3584.71 2680,3855 2790,3965 3326.07,3965 3400,4038.93 3400,4936.07 3200,5136.07 R11.1
NetIC3_14: IC3.14 R17.1 | length 2083.7
  Bottom Layer w30: 2668.19,3511.66 2680.35,3499.51 2829.71,3499.51
  Bottom Layer w40: 2668.19,3511.66 2620,3559.85 2620,5030 2770,5180 R17.1 ; 2829.71,3499.51 2835.2,3499.51 IC3.14@2899.71,3435
NetIC3_15: IC3.15 R16.1 | length 3026
  Bottom Layer w40: IC3.15@2788.48,3423.78 2788.48,3398.86 2723.99,3334.37 2472.76,3334.37 2245,3562.13 2245,4969 2661,5385 2825.92,5385 2924.26,5286.66 2924.26,5268.86 R16.1@2938.12,5255
NetIC4_6: IC4.6 R19.2 | length 1474.3
  Top Layer w40: v1(4390,3335) v1(4905,3335)
  Bottom Layer w40: IC4.6 4263.83,3178.83 4263.83,3208.83 v1@4388.09,3333.09 ; v1(4905,3335) 5155,3335 R19.2@5507.26,3687.26
NetIC5_2: IC5.2 R21.2 SW2.2 | length 2197.3
  Top Layer w40: v1(2035,1245) v1@2035,1587.29
  Bottom Layer w40: v1(2035,1245) 3091.29,1245 3225,1378.71 R21.2 3561.57,1385 3585,1408.43 SW2.2 ; v1(2035,1590) 2036.91,1591.91 2036.91,1676.91 IC5.2
NetIC5_7: IC5.7 SW3.1 | length 1376.2
  Top Layer w40: v1(2785,1555) v1(3025,1555)
  Bottom Layer w40: IC5.7 2540,1556.86 2606.86,1490 2709.18,1490 2774.18,1555 v1(2785,1555) ; v1(3025,1555) 3025,1823 SW3.1
NetIC5_10: IC5.10 R20.2 SW1.2 | length 3619.4
  Top Layer w40: v1(2945,1175) v1(2945,1425) ; v1(2945,1995) 2945,1683.99 v1@2946.91,1683.99
  Bottom Layer w40: R20.2@1174.14,1748.97 1259.5,1748.97 1259.5,1739.5 1328.5,1670.5 1328.5,1341.9 1555.4,1115 2884.79,1115 2944.79,1175 v1(2945,1175) ; IC5.10 2543.65,1976.35 2543.65,1918.43 2567.08,1895 2896.51,1895 2943.09,1941.58 2943.09,1993.09 v1(2945,1995) ; v1(2945,1425) v1(2945,1679.37)
NetIC5_15: IC5.15 SW5.1 | length 1087.6
  Top Layer w40: SW5.1@1245.3,2144.7 SW5.1@1252,2138 ; v1(1520,2235) v1(2040,2235)
  Bottom Layer w40: SW5.1 1354,2235 v1(1520,2235) ; IC5.15 v1(2040,2235)
NetIC6_3: IC6.3 IC11.7 IC11.15 | length 4711.2
  Top Layer w40: v1(6705,1695) v1(6705,2100)
  Bottom Layer w40: IC6.3 4486.51,1788.43 4579.94,1695 v1(6705,1695) 6890,1695 7035,1550 7347.74,1550 7397.74,1500 7735,1500 7780.29,1545.29 IC11.15 ; v1(6705,2100) 7225,2100 7279.38,2045.62 7279.38,1990.99 IC11.7
NetIC9_9: IC9.9 R30.1 | length 887.8
  Bottom Layer w40: R30.1@6251.97,3711.97 6309.51,3769.51 6405.49,3769.51 6435,3740 6435,3590 6766.35,3258.65 6766.35,3213.65 IC9.9
NetIC9_10: IC9.10 R29.1 | length 575.7
  Bottom Layer w40: 6355,3655.6 6355,3555 6666.35,3243.65 6666.35,3214.07 IC9.10@6670,3210.42
NetIC9_11: IC9.11 R28.1 | length 1061.8
  Bottom Layer w30: 6635.63,3105 6839.53,3105
  Bottom Layer w40: R28.1@6504.44,3691.95 6515.74,3680.65 6515.74,3600.65 6839.53,3276.86 6839.53,3105 ; IC9.11 6570,3170.63 6635.63,3105
NetIC9_12: IC9.12 R27.1 | length 2722.9
  Bottom Layer w40: IC9.12 6470,3300 6165,3605 6165,3725.57 6268.93,3829.51 6741.37,3829.51 6790,3878.14 6790,5080 6655,5215
NetIC9_13: IC9.13 R26.1 | length 2703.4
  Bottom Layer w40: IC9.13 6370,3300 6105,3565 6105,3760 6242,3897 6660,3897 6730,3967 6730,5010 6525,5215
NetIC9_14: IC9.14 R32.1 | length 2276.7
  Bottom Layer w40: R32.1 6245,5120 6150,5120 6060,5030 6060,3799.85 6045,3784.85 6045,3478.82 6270,3253.82 IC9.14
NetIC9_15: IC9.15 R31.1 | length 2577.8
  Bottom Layer w40: IC9.15 6170,3219.84 5985,3404.84 5985,5170 6160,5345 6345,5345 6384.26,5305.74 6384.26,5260.74 R31.1
NetIC10_9: IC10.9 R37.1 | length 1114.2
  Bottom Layer w30: 7365.02,3770.6 7408.93,3814.51 7635.79,3814.51 7691.26,3759.04
  Bottom Layer w40: R37.1 7290,3695.57 7365.02,3770.6 ; 7691.26,3759.04 7691.26,3550.74 7910,3332 IC10.9
NetIC10_10: IC10.10 R36.1 | length 872.7
  Bottom Layer w30: R36.1@7397.84,3702.16 7460.19,3764.51 7605.49,3764.51 7625,3745
  Bottom Layer w40: 7625,3745 7625,3529.86 7810,3344.86 IC10.10
NetIC10_11: IC10.11 R35.1 | length 550.8
  Bottom Layer w40: R35.1 7550,3469.37 7710,3309.37 IC10.11
NetIC10_12: IC10.12 R34.1 | length 3630.6
  Bottom Layer w40: IC10.12 7610,3155 7635,3130 7945,3130 8140,3325 8304.85,3325 8560,3580.15 8560,4952.88 8257.88,5255 R34.1@7629.08,5255
NetIC10_13: IC10.13 R33.1 | length 4188
  Bottom Layer w40: IC10.13 7510,3170 7610,3070 7980,3070 8175,3265 8329.71,3265 8625,3560.29 8625,5094 8389,5330 7553.71,5330 7530.28,5306.57 7530.28,5257.5 R33.1@7527.78,5255
NetIC10_14: IC10.14 R39.1 | length 4957.2
  Bottom Layer w30: 7207.28,3724.29 7347.5,3864.51 7670.64,3864.51 7704.77,3830.37
  Bottom Layer w40: 7207.28,3724.29 7202.35,3719.36 7202.35,3592.65 7410,3385 IC10.14 ; R39.1@7235,5222.37 7235,5138.43 7258.43,5115 8115,5115 8490,4740 8490,3595 8280,3385 8014.53,3385 7760,3639.53 7760,3775.15 7704.77,3830.37
NetIC10_15: IC10.15 R38.1 | length 4765.2
  Bottom Layer w30: 7221.37,3969.51 7735.35,3969.51 ; 7967,4445 8287.43,4445 8305,4462.57
  Bottom Layer w35: 8305,4462.57 8320,4477.57 8320,4765 8305,4780
  Bottom Layer w40: 7221.37,3969.51 7082.35,3830.49 7082.35,3437.65 7224.8,3295.2 7280.45,3295.2 7303.88,3271.77 7303.88,3239.43 7306.35,3236.96 7306.35,3213.65 IC10.15 ; R38.1@7378.75,5253.75 7377.22,5255.28 7377.22,5281.57 7318.79,5340 7133.43,5340 7110,5316.57 7110,5063.63 7133.43,5040.2 8044.8,5040.2 8305,4780 ; 7735.35,3969.51 7774.25,3930.6 7924.17,3930.6 7967,3973.43 7967,4445
NetIC11_10: IC11.10 R42.2 U1.3 | length 2805.6
  Top Layer w40: v1(6365,1460) v1(6365,1777.5)
  Bottom Layer w40: R42.2@6273.86,1772.5 6273.86,1775.59 6363.09,1775.59 v1(6365,1777.5) ; v1(6365,1460) 7129.85,1460 7209.85,1380 7540,1380 7625,1295 U1.3 ; v1@6365,1775 6935,1775 7100,1610 7256.35,1610 7279.78,1633.43 7279.78,1689.56 IC11.10
NetLED1_1: LED1.1 LS1.1 R19.1 | length 787.8
  Bottom Layer w40: LS1.1 5330.5,4063.43 5353.93,4040 5636.57,4040 5660,4063.43 LED1.1@5660,4365.79
NetLED3_1: LED3.1 U1.1 U1.2 VR1.1 | length 2179.8
  Bottom Layer w40: VR1.1@6530,1352.1 6530,1138.43 6553.43,1115 7695,1115 7725,1145 U1.2 8011.32,1280 8081.32,1350 LED3.1
NetLED4_2: LED4.2 R41.2 | length 454.8
  Bottom Layer w40: R41.2 8410,3725 LED4.2
NetLED5_2: LED5.2 R42.1 | length 491.3
  Bottom Layer w40: LED5.2 6236.57,1105 6260,1128.43 R42.1
P1: IC1.14 IC3.2 IC5.5 | length 8155.7
  Top Layer w40: v1(2795,2925) v1(3360,2925) ; v1(3610,3650) v1(3975,3650) ; v1(3975,4150) 3975.48,4150.48 4653.56,4150.48 v1(4654.04,4150.96)
  Bottom Layer w30: 1735,2820 1790,2875 2745,2875 v1(2795,2925)
  Bottom Layer w40: 1735,2820 1675,2760 1675,2391.48 1650,2366.48 1650,1634.85 1914.85,1370 2764.12,1370 2865,1470.88 2865,1734.57 2840.2,1759.37 2369.66,1759.37 2346.22,1735.94 2346.22,1709.54 2343.65,1706.96 2343.65,1683.65 IC5.5 ; IC3.2@2794.71,3140.39 IC3.2 2794.71,2925.29 v1(2795,2925) ; v1(3360,2925) 3455,2925 3610,3080 v1(3610,3650) ; v1(3975,3650) v1(3975,4150) ; IC1.14 4560,4489.59 4570,4479.59 4570,4475 4654.04,4390.96 v1@4654.04,4153.67
P2: IC2.2 IC4.14 IC5.13 | length 4863.8
  Top Layer w40: v1(1515,2455) v1(2200,2455)
  Bottom Layer w40: IC2.2 1320,3047.84 1515,2852.84 v1(1515,2455) ; IC5.13@2235,1993.64 2240,1998.64 2240,2165.88 2195,2210.88 2195,2450 v1(2200,2455) 3690,2455 3815,2330 4496.57,2330 4520,2353.43 4520,2504.85 4560,2544.85 IC4.14@4560,2889.32
Q1: IC1.1 IC3.6 IC5.6 | length 7908.6
  Top Layer w35: v1(2795,2790) v1(3360,2790)
  Bottom Layer w30: 1895,2820 1900,2825 2710,2825 2741.17,2793.83 2791.17,2793.83 v1(2795,2790)
  Bottom Layer w35: v1(3360,2790) 3515,2790
  Bottom Layer w40: 1895,2820 1885,2820 1755,2690 1755,2386.63 1710,2341.63 1710,1659.71 1939.71,1430 2291.92,1430 2440,1578.08 IC5.6 ; v1(2795,2790) 3025,2790 3189.42,2954.42 3189.42,3080.55 3205,3096.13 3205,3120 3199.92,3114.92 IC3.6 ; 3515,2790 3745,3020 3745,4844.71 3940.29,5040 4620,5040 4760,4900 IC1.1
Q2: IC2.6 IC4.1 IC5.14 | length 5110.1
  Top Layer w40: v1(2310,2545) v1(2310,2990) ; v1(2630,2995) v1(3360,2995) ; v1(3545,3425) 3962.29,3425 3967.29,3430 v1(3970,3430)
  Bottom Layer w40: IC2.6 1720,3125.16 1855.16,2990 2622.29,2990 2627.29,2995 v1(2630,2995) ; IC5.14 2140,2140 2105,2175 2105,2501.57 2148.43,2545 v1(2310,2545) ; v1(3360,2995) 3361.91,2996.91 3421.91,2996.91 3545,3120 v1(3545,3425) ; v1(3970,3430) 4110,3570 4736.57,3570 4760,3546.57 IC4.1
R1: IC1.11 IC3.1 IC5.4 | length 12729.9
  Top Layer w40: v1(1060,3045) v1(1460,3045) ; v1(2240,1180) v1@2240,1582.29
  Bottom Layer w30: 1790,2930 2683.14,2930 2688.14,2935
  Bottom Layer w40: 1155,1847.73 1277.27,1847.73 1421.5,1703.5 1421.5,1479.58 1721.08,1180 v1@2237.29,1180 ; 1155,1850.44 1155,2950 v1(1060,3045) 1060,5035 1665,5640 4405,5640 4890,5155 4890,4723.58 4831.42,4665 4692.72,4665 4673.12,4645.4 4545.25,4645.4 4494.85,4595 4331.01,4595 4267.04,4531.03 4267.04,4517.04 IC1.11 ; v1(1460,3045) 1461.91,3043.09 1676.91,3043.09 1790,2930 ; 2164.22,1845 2240,1769.22 v1(2240,1585) ; 2688.14,2935 2699.71,2946.57 IC3.1@2699.71,3135
R2: IC2.1 IC4.11 IC5.12 | length 5488.8
  Top Layer w40: v1(1579.83,2379.81) 1579.93,2379.9 2259.9,2379.9 v1(2260,2380) ; v1(1580,2620) v1@1982.29,2620
  Bottom Layer w30: v1(1985,2620) 1985.43,2620.43 2641.8,2620.43 2662.24,2600
  Bottom Layer w40: IC2.1 1229.53,3125.47 1229.53,3053.46 1280,3002.99 1280,2403.24 1303.43,2379.81 v1(1579.83,2379.81) ; v1@1580,2375.75 v1(1580,2620) ; v1(2260,2380) 2262.71,2380 2340,2302.71 IC5.12 ; 2662.24,2600 2727.24,2535 4236.57,2535 4260,2558.43 IC4.11@4260,2899.31
S1: IC1.9 IC3.7 IC5.3 | length 5932
  Top Layer w40: v1(3675,4065) v1(4355,4065)
  Bottom Layer w30: 1920,2660 1940,2680 2667.09,2680 2687.09,2660
  Bottom Layer w40: 1920,2660 1875,2615 1875,2336.92 1830,2291.92 1830,1803.43 1853.43,1780 2116.05,1780 2139.49,1756.57 2139.49,1680.51 IC5.3 ; 2687.09,2660 2737.09,2610 3271.57,2610 3294.71,2633.14 3294.71,2855 ; IC3.7 3294.71,2855 ; v1(3675,4065) 3675,3040 3490,2855 3294.71,2855 ; IC1.9 4060,4489.59 4100,4449.59 4100,4320 v1(4355,4065)
S2: IC2.7 IC4.9 IC5.11 | length 3921.8
  Top Layer w40: v1(2440,2370) v1(2440,3055) ; v1(3665,2305) v1(3665,2615)
  Bottom Layer w40: IC2.7 1826.22,3128.78 1826.22,3118.93 1890.16,3055 v1(2440,3055) ; IC5.11 2440,2207.29 2439.57,2207.73 2439.57,2305 ; v1(2440,2370) 2439.57,2369.57 2439.57,2305 ; v1(3665,2305) 2439.57,2305 ; v1(3665,2615) 4055,2615 4060,2620 IC4.9
pads on no net: DS1.5 DS2.5 DS3.5 DS4.5 IC1.7 IC4.7 IC6.4 IC6.5 IC6.6 IC6.8 IC6.9 IC6.10 IC6.11 IC6.12 IC6.13 IC6.14 SW1.3 SW1.4 SW2.3 SW2.4 SW3.3 SW3.4 SW4.3 SW4.4 SW5.3 SW5.4 U1.4 U1.5 U1.6 U1.8 U1.9 U1.10 U1.11 U1.12 U1.13
copper on no net: | length 27561
  Bottom Layer w10: 770,545 770,5975 9120,5975 9120,545 770,545
  Bottom Layer w40: 2040,4175 2040.68,4174.32

## Other copper
Bottom Layer:
  text "N8 - MACH DEM SAN PHAM" at 5540,1120 h80

## Text inside footprints (layer, text, board x,y; h text height)
IC2: Top Overlay "DIP-16" at 1400,3255 h59.05
IC3: Top Overlay "DIP-16" at 2874.71,3234.92 h59.05
IC5: Top Overlay "DIP-16" at 2120,1800 h59.05
IC9: Top Overlay "DIP-16" at 6250,3030 h59.05
IC10: Top Overlay "DIP-16" at 7390,3030 h59.05
IC11: Top Overlay "DIP-16" at 7700.29,1870.08 h59.05 r180
LS1: Top Overlay "+" at 5358.5,4255.5 h60 r90